# Altium PCB ZHL_RF_AMP.pcbdoc (part 1 of 2)
Units mm, origin at the board's own origin, x right, y up, seen from the top; angles counter-clockwise.
Board outline 160 x 100 mm, 2 copper layers (Top Layer, Bottom Layer), stack 1.51 mm thick; 97 components, 32 nets, 298 pads, 97 vias.
Unrouted connection lines stored in the file: 7.
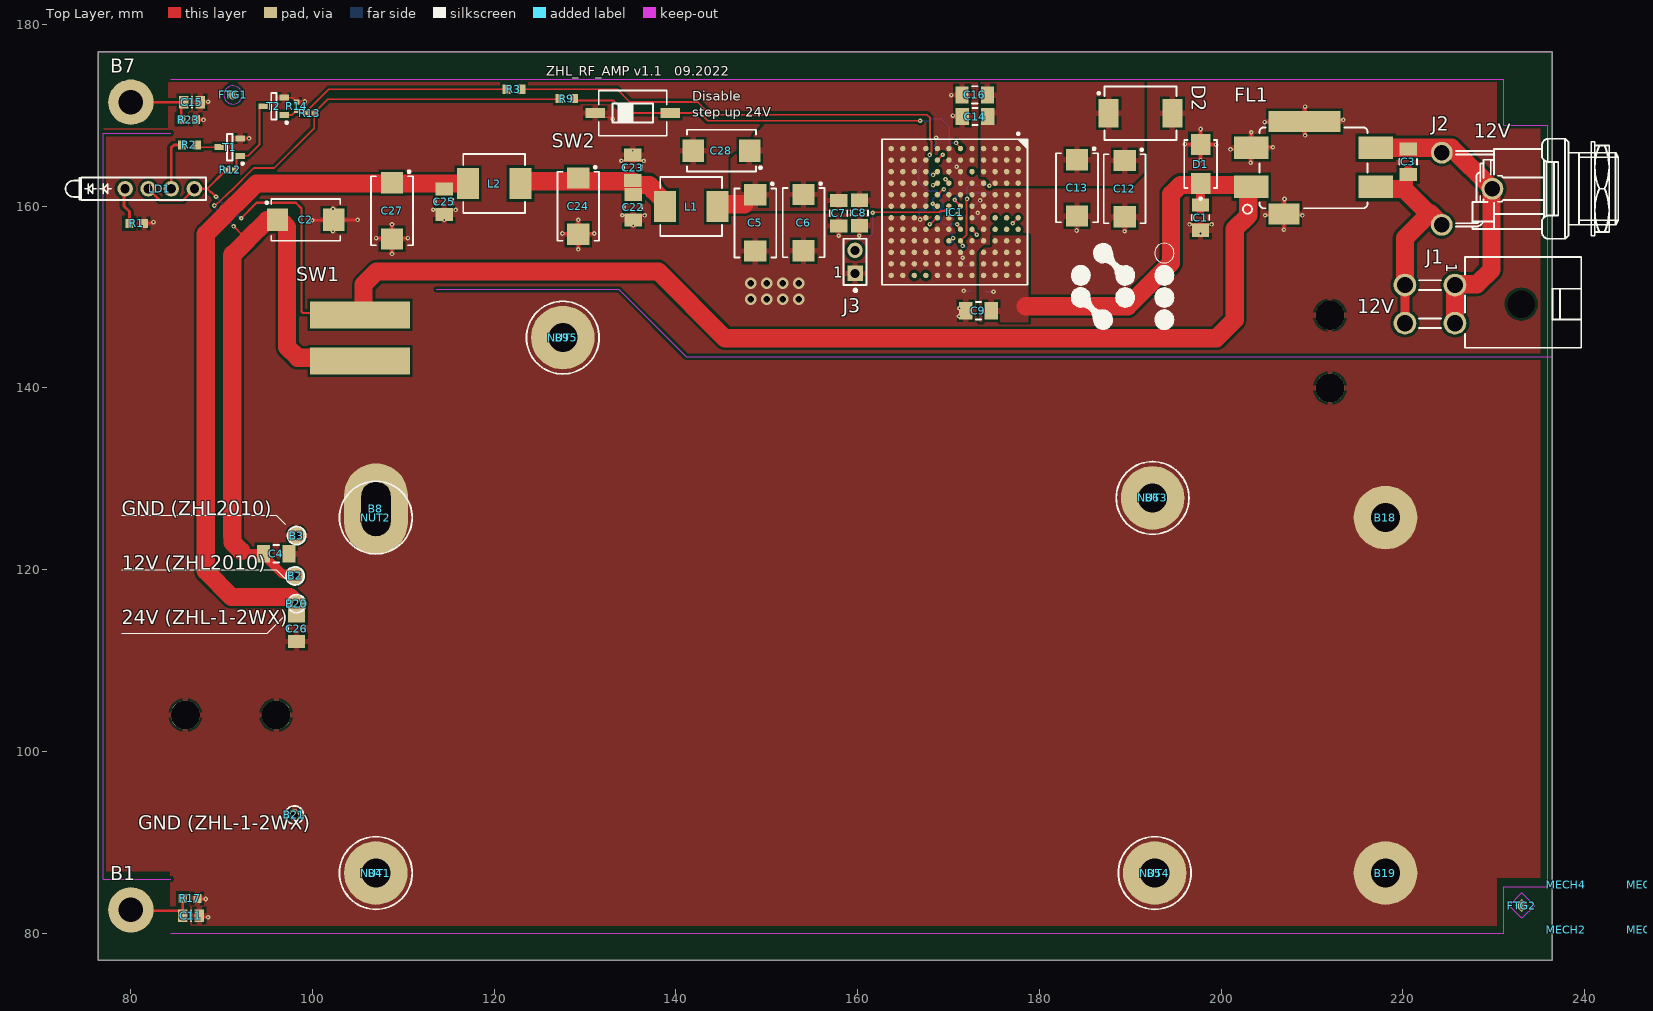
[diagram p0: Top Layer view]
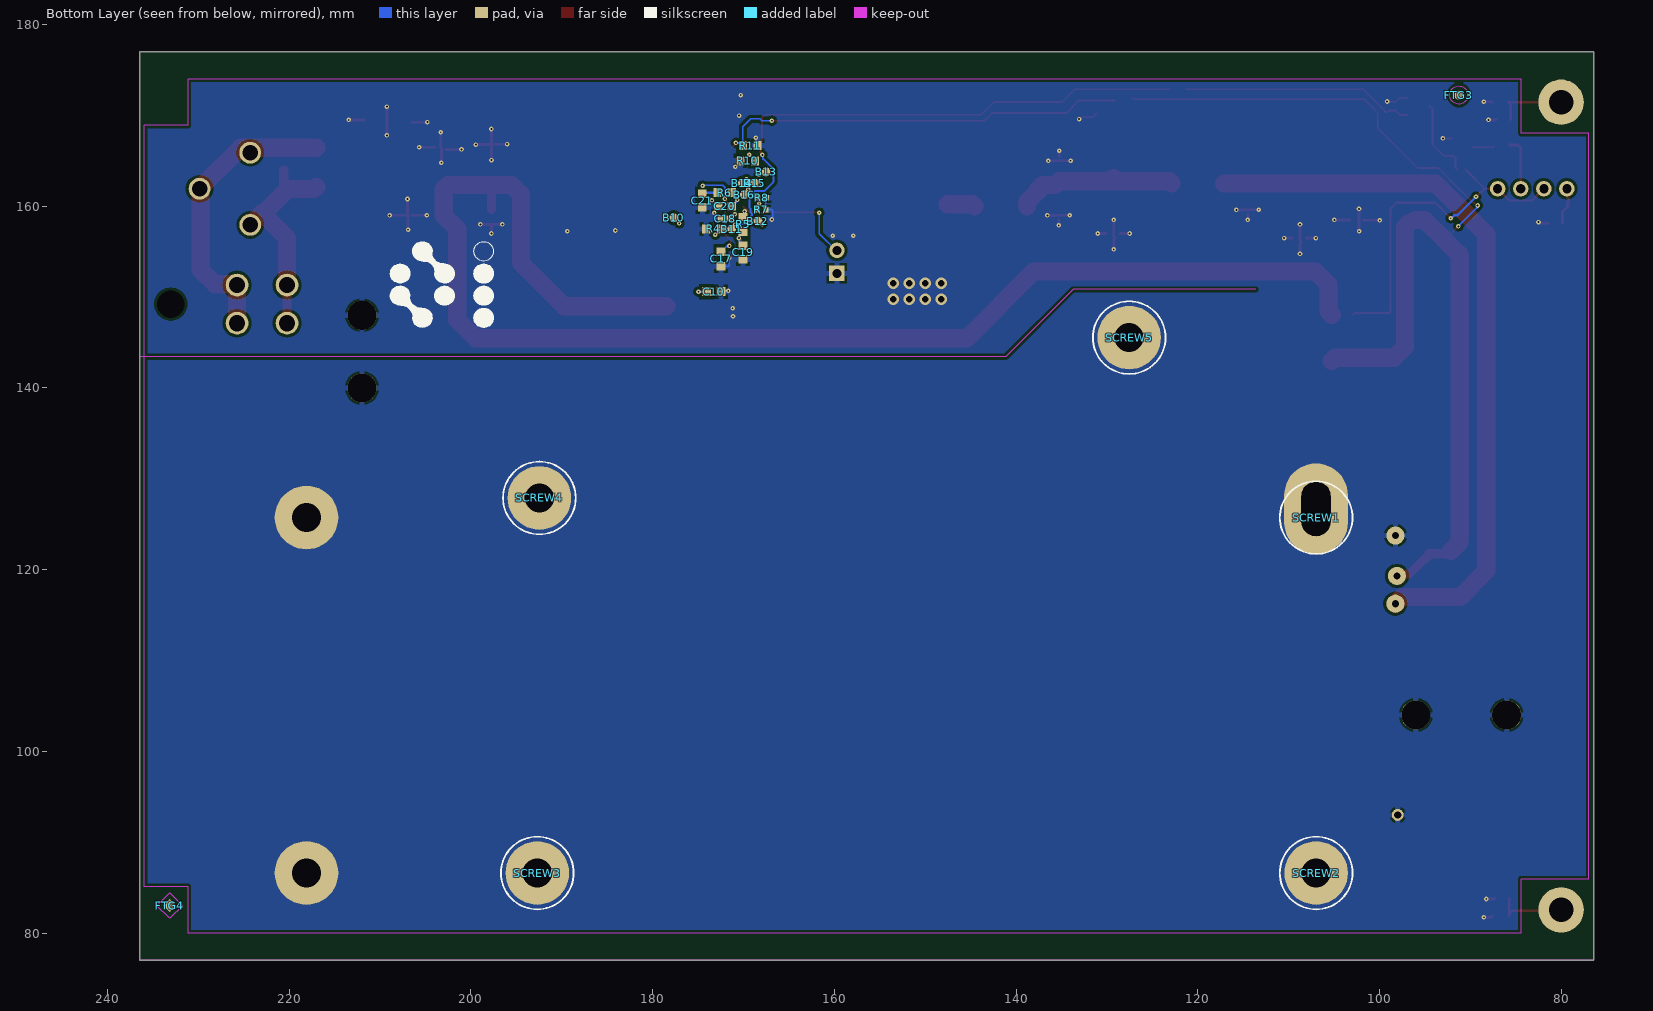
[diagram p1: Bottom Layer view, seen from below]
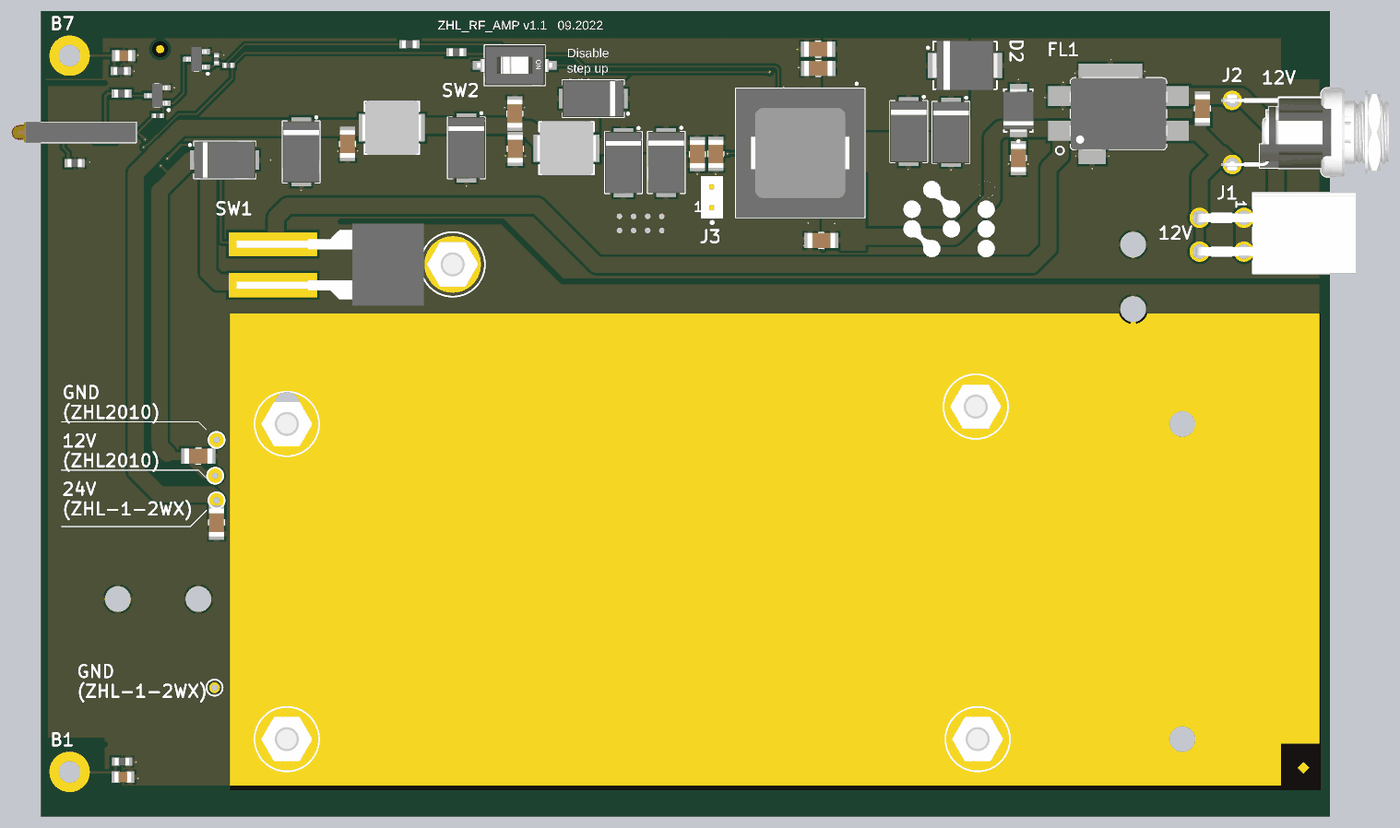
[diagram p2: 3D render of the assembled board from above, using the file's embedded part models]
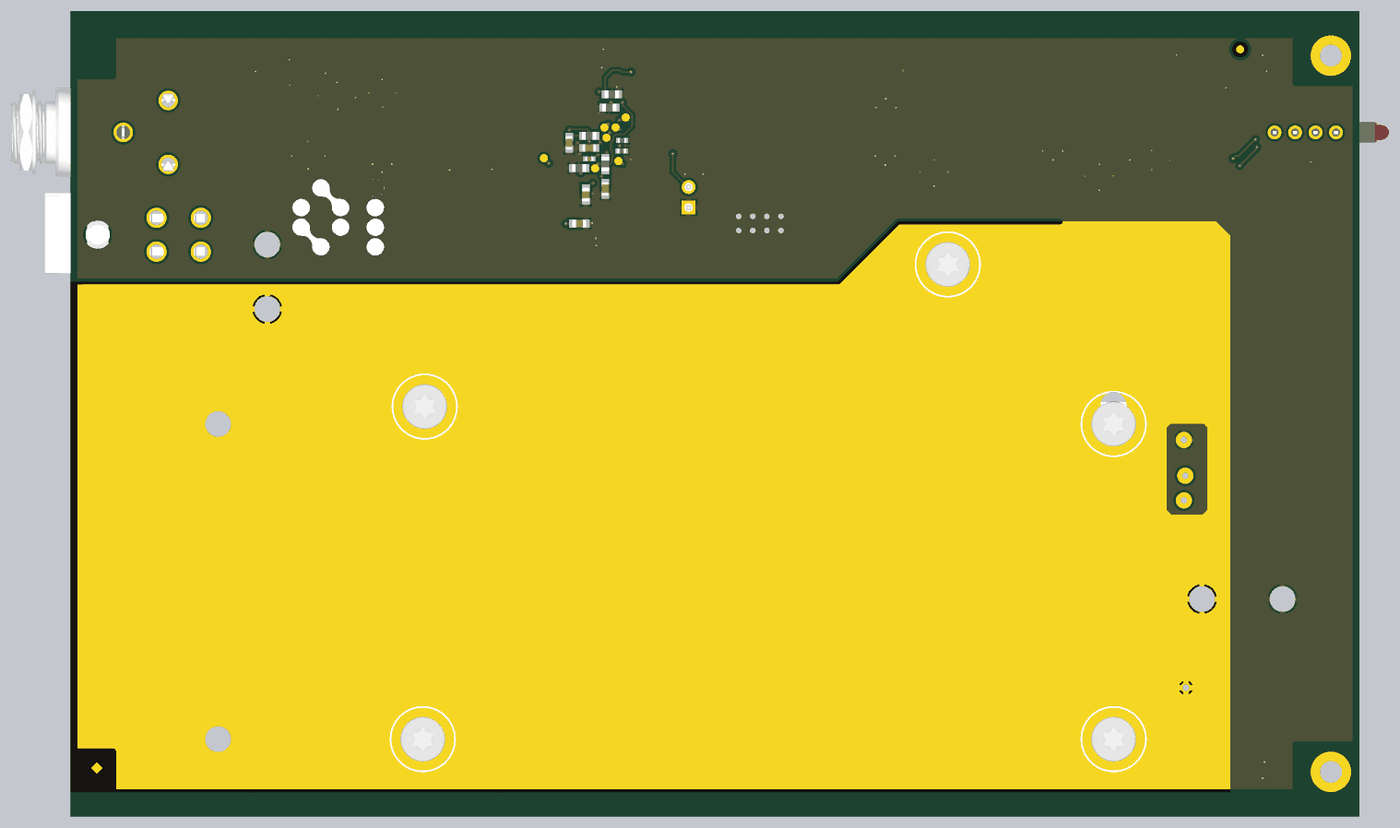
[diagram p3: 3D render of the assembled board from below, using the file's embedded part models]

## Layer stack, top to bottom
Top Solder: solder mask 0.02, Solder Resist, Dk 3.5
Top Layer: signal copper 0.105
Dielectric1: core 1.3, FR-4, Dk 4.8
Bottom Layer: signal copper 0.105
Bottom Solder: solder mask 0.02, Solder Resist, Dk 3.5

## Board outline
76.44,77 236.44,77 236.44,177 76.44,177

## Design rules (kind name [scope] priority, off if disabled: settings)
Clearance [All] p1: gap=0.31 ignorepadtopadclearanceinfootprint=FALSE except(0: Arc-Hole Track-Hole SMDPad-Hole THPad-Hole Via-Hole Fill-Hole Poly-Hole Region-Hole Text-Hole; 0.152: SMDPad-Via; 0.203: Arc-SMDPad Track-SMDPad SMDPad-SMDPad)
ComponentClearance [All] p1: gap=0 collisioncheckmode=3 verticalgap=0.35 showdistances=FALSE
FabricationTestPointUsage TestPointUsage [All] p1: valid=0 allowmultiple=FALSE
FabricationTestpoint Testpoint [All] p1: side=3 testpointundercomponent=TRUE minsize=1.016 maxsize=2.54 preferedsize=1.524 minholesize=0 maxholesize=1.016 preferedholesize=0.813 testpointgrid=0.025 allowsidetop=TRUE allowsidebottom=TRUE usegrid=TRUE gridtolerance=0
HoleSize [All] p1: absolutevalues=TRUE maxlimit=5 minlimit=0.2 maxpercent=80.000 minpercent=20.000
HoleToHoleClearance [All] p1: gap=0.2 allowstackedmicrovias=TRUE
MinimumSolderMaskSliver [All] p1: minsoldermaskwidth=0
PermittedLayers [All] p1: toplayerpermitted=TRUE bottomlayerpermitted=FALSE
PlaneConnect [All] p1: planeconnectstyle=Relief reliefexpansion=0.508 reliefentries=4 reliefconductorwidth=0.381 reliefairgap=0.381
PolygonConnect "Vias Direct Connect" [IsVia] p1: connectstyle=Direct reliefconductorwidth=0.254 reliefentries=4 polygonreliefangle="90 Angle" airgapwidth=0.254
PolygonConnect [All] p2: connectstyle=Relief reliefconductorwidth=0.635 reliefentries=4 polygonreliefangle="90 Angle" airgapwidth=0.254
RoomDefinition ZHL_RF_AMP [InComponentClass('ZHL_RF_AMP')] p1 off: confinementstyle=ConfineIn formatcopy=TRUE lockcomponents=FALSE outline 237.49,78.74 217.805,78.74 217.805,92.71 237.49,92.71
RoutingVias [All] p1: holewidth=0.5 width=1 viastyle="Through Hole" minholewidth=0.5 minwidth=1 maxholewidth=0.5 maxwidth=1 useviatemplates=TRUE viatemplateguid#1={BCE3457C-C7C0-4E2B-980E-B4B64992E005} viatemplateguid#2={BB2B6972-5096-462C-BB5A-72A028E2D88E} viatemplateguid#3={66140A83-6F2B-40DF-B3B9-31CC220CE52E} viatemplatename#1=v50h20m0mx0 viatemplatename#2=v60h30 viatemplatename#3=v127h71m0mx0
SilkToSilkClearance [All] p1: silktosilkclearance=0
SilkToSolderMaskClearance SilkscreenOverComponentPads [IsPad] p1: minsilkscreentomaskgap=0 clearancetoexposedcopper=TRUE
SolderMaskExpansion [All] p1: expansion=0 istentingtop=FALSE
Width [All] p1: maxlimit=2.54 minlimit=0.2 preferedwidth=0.305
21 further rules are at their usual default settings.

## Components (designator, comment, footprint, x,y, rotation, side; value= is the part's Value field where it differs from the comment)
B1 "Plated Hole" MTG270_500 80.01,82.55 r0 top
B2 "Plated Hole" c130h80#1 98.078,119.31 r0 top
B3 "Plated Hole" c130h80#1 98.25,123.75 r0 top
B4 "Plated Hole" MTG320_700#1 106.969,86.61 r0 top
B5 "Plated Hole" MTG320_700#1 192.699,86.61 r0 top
B6 "Plated Hole" MTG320_700#1 192.465,127.89 r0 top
B7 "Plated Hole" MTG270_500 80.01,171.45 r0 top
B8 "Plated Hole" MTG320_700#2 106.985,126.695 r0 top
B9 "Plated Hole" MTG320_700#1 127.55,145.54 r0 top
B10 "SMD Pad" C100 177.67,158.73 r90 bottom
B11 "SMD Pad" C100 171.32,157.46 r90 bottom
B12 "SMD Pad" C100 168.427,158.369 r90 bottom
B13 "SMD Pad" C100 167.513,163.779 r90 bottom
B14 "SMD Pad" C100 170.155,162.535 r90 bottom
B15 "SMD Pad" C100 168.78,162.54 r90 bottom
B16 "SMD Pad" C100 169.901,161.265 r90 bottom
B18 "Plated Hole" MTG320_700#1 218.099,125.73 r0 top
B19 "Plated Hole" MTG320_700#1 218.099,86.61 r0 top
B20 "Plated Hole" c130h80#1 98.25,116.25 r0 top
B21 "Plated Hole" c130h80#2 98,93 r0 top
C1 "10uF" CAPC3216X190N 197.75,158.75 r90 top
C2 "47uF" CAPMP7343X430N 99.25,158.5 r0 top
C3 "10uF" CAPC3216X190N 220.605,164.885 r270 top
C4 "10uF" CAPC3216X190N 96,121.75 r180 top
C5 "47uF" CAPMP7343X430N 148.742,158.166 r270 top
C6 "47uF" CAPMP7343X430N 154.051,158.191 r270 top
C7 "10uF" CAPC3216X190N 157.912,159.233 r90 top
C8 "10uF" CAPC3216X190N 160.198,159.258 r90 top
C9 "10uF" CAPC3216X190N 173.3,148.5 r0 top
C10 "1uF" CAPC1608X87N 173.279,150.597 r0 bottom
C11 "Undefined" CAPC2012X135N 86.625,81.915 r0 top
C12 "47uF" CAPMP7343X430N 189.398,161.929 r270 top
C13 "47uF" CAPMP7343X430N 184.148,162.029 r270 top
C14 "10uF" CAPC3216X190N 172.923,169.875 r0 top
C15 "Undefined" CAPC2012X135N 86.73,171.45 r0 top
C16 "10uF" CAPC3216X190N 172.9,172.25 r0 top
C17 "1uF" CAPC1608X87N 172.466,154.203 r90 bottom
C18 "100nF" CAPC1005X55N 172.034,158.648 r180 bottom
C19 "4.7uF" CAPC1608X90N 170.05,154.92 r270 bottom
C20 "Undefined" CAPC1608X90N 172.05,160 r180 bottom
C21 "Undefined" CAPC1608X90N 174.523,160.63 r90 bottom
C22 "10uF" CAPC3216X190N 135.306,159.893 r90 top
C23 "10uF" CAPC3216X190N 135.25,164.25 r270 top
C24 "47uF" CAPMP7343X430N 129.25,160 r270 top
C25 "10uF" CAPC3216X190N 114.5,160.5 r90 top
C26 "10uF" CAPC3216X190N 98.25,113.5 r90 top
C27 "47uF" CAPMP7343X430N 108.75,159.5 r270 top
C28 "47uF" CAPMP7343X430N 145.009,166.116 r180 top
D1 "SMBJ12A" DIOM5336X265N 197.745,164.64 r90 top
D2 "B560C-13-F" DIOM7959X250N 191.135,170.231 r0 top
FL1 "10A/50VDC" FIL_MURATA_BNX02 210.175,164.23 r180 top
FTG1 "Use only in PCB" FIDUCIAL_TOP_C100-200 91.25,172.25 r90 top
FTG2 "Use only in PCB" FIDUCIAL_TOP_S100-200 233.121,83.033 r90 top
FTG3 "Use only in PCB" FIDUCIAL_TOP_C100-200 91.262,172.237 r90 bottom
FTG4 "Use only in PCB" FIDUCIAL_TOP_S100-200 233.147,83.033 r90 bottom
IC1 "LTM4656EY" BGA144C127P12X12_1600X1600X742 170.685,159.365 r270 top
J1 "Mini-Fit Jr.™" MOLEX_39-30-0040 222.995,149.225 r270 top
J2 "Jack" SWITCHCRAFT_712RA 229.87,161.925 r90 top
J3 "Header 2" SAMTEC_HTSW-101-23-L-D 159.715,153.873 r0 top
L1 "10uH" INDM6965X300N 141.681,159.969 r180 top
L2 "10uH" INDM6965X300N 120,162.5 r180 top
LD1 "Red/Green" LED_DIALIGHT_571-0112F 79.375,161.925 r0 top
MECH1 "PE9067" GENERIC_MECH 246.863,80.366 r90 top
MECH2 "PE9067" GENERIC_MECH 237.973,80.366 r90 top
MECH3 "ZHL-1-2WX-S" GENERIC_MECH 246.863,85.293 r90 top
MECH4 "20849107" GENERIC_MECH 237.973,85.293 r90 top
MECH5 "ZHL-2010s" GENERIC_MECH 255.778,85.293 r90 top
NUT1 "M3" BOSSARD_BN628-1241443_v 106.969,86.61 r0 top
NUT2 "M3" BOSSARD_BN628-1241443_v 106.969,125.73 r0 top
NUT3 "M3" BOSSARD_BN628-1241443_v 192.465,127.89 r0 top
NUT4 "M3" BOSSARD_BN628-1241443_v 192.699,86.61 r0 top
NUT5 "M3" BOSSARD_BN628-1241443_v 127.55,145.54 r0 top
R1 "4k7" RESC1608X55N 80.645,158.115 r180 top
R2 "4k7" RESC1608X55N 86.45,166.75 r180 top
R3 "0" RESC1608X55N 122.174,172.872 r180 top
R4 "11k5" RESC1608X55N 173.3,157.5 r0 bottom
R5 "0" RESC1608X55N 170.05,158 r90 bottom
R6 "Undefined" RESC1608X55N 172.05,161.5 r0 bottom
R7 "120k" RESC1005X40N 168.021,159.614 r0 bottom
R8 "120k" RESC1005X40N 167.97,160.934 r0 bottom
R9 "4k7" RESC1608X55N 127.991,171.856 r0 top
R10 "20k" RESC1608X55N 169.55,165 r180 bottom
R11 "4k7" RESC1608X55N 169.246,166.668 r0 bottom
R12 "120k" RESC1005X40N 90.97,164 r180 top
R13 "120k" RESC1005X40N 99.72,170.25 r0 top
R14 "120k" RESC1005X40N 98.25,171 r270 top
R17 "0" RESC1608X55N 86.525,83.82 r180 top
R23 "0" RESC1608X55N 86.36,169.545 r180 top
SCREW1 "M3x8" BOSSARD_BN5687-3061606_v 106.969,125.73 r180 bottom
SCREW2 "M3x8" BOSSARD_BN5687-3061606_v 106.969,86.61 r180 bottom
SCREW3 "M3x8" BOSSARD_BN5687-3061606_v 192.699,86.61 r180 bottom
SCREW4 "M3x8" BOSSARD_BN5687-3061606_v 192.465,127.89 r180 bottom
SCREW5 "M3x8" BOSSARD_BN5687-3061606_v 127.55,145.54 r180 bottom
SW1 "67L090" AIRPAX_6700_h_a 105.25,145.5 r270 top
SW2 "Switch" SW_OMRON_A6SN-1101 135.25,170.25 r0 top
T1 "BSS138LT1G" SOT95P240X110-3N 90.9,166.5 r180 top
T2 "BSS138LT1G" SOT95P240X110-3N 95.75,171 r180 top

## Footprints (in the part's own frame and the unit in brackets; to place one, negate y for a bottom-side part, rotate by r counter-clockwise, add the part's x,y. Pads: shape width x height; smd on the part's side, far side on the other; paste and mask are expansions set on the pad)
AIRPAX_6700_h_a [mm] "TO-220 2-Terminal - Horizontal Surface Mount Through The Circuit Board"
  rect 3x11 smd paste-1.5: 1(-2.54,0) 2(2.54,0)
  body extent -5.08,-4.5 5.08,25.09, height 3.95
BGA144C127P12X12_1600X1600X742 [mm] "BGA, 1.27mm Pitch, Square; 144 Pin, 12 Columns X 12 Rows,16.00mm X 16.00mm X 7.42mm H (w/Reversed Pins)"
  round 0.6 smd: A1(-6.985,6.985) A2(-5.715,6.985) A3(-4.445,6.985) A4(-3.175,6.985) A5(-1.905,6.985) A6(-0.635,6.985) A7(0.635,6.985) A8(1.905,6.985) A9(3.175,6.985) A10(4.445,6.985) A11(5.715,6.985) A12(6.985,6.985) B1(-6.985,5.715) B2(-5.715,5.715) B3(-4.445,5.715) B4(-3.175,5.715) B5(-1.905,5.715) B6(-0.635,5.715) B7(0.635,5.715) B8(1.905,5.715) B9(3.175,5.715) B10(4.445,5.715) B11(5.715,5.715) B12(6.985,5.715) C1(-6.985,4.445) C2(-5.715,4.445) C3(-4.445,4.445) C4(-3.175,4.445) C5(-1.905,4.445) C6(-0.635,4.445) C7(0.635,4.445) C8(1.905,4.445) C9(3.175,4.445) C10(4.445,4.445) C11(5.715,4.445) C12(6.985,4.445) D1(-6.985,3.175) D2(-5.715,3.175) D3(-4.445,3.175) D4(-3.175,3.175) D5(-1.905,3.175) D6(-0.635,3.175) D7(0.635,3.175) D8(1.905,3.175) D9(3.175,3.175) D10(4.445,3.175) D11(5.715,3.175) D12(6.985,3.175) E1(-6.985,1.905) E2(-5.715,1.905) E3(-4.445,1.905) E4(-3.175,1.905) E5(-1.905,1.905) E6(-0.635,1.905) E7(0.635,1.905) E8(1.905,1.905) E9(3.175,1.905) E10(4.445,1.905) E11(5.715,1.905) E12(6.985,1.905) F1(-6.985,0.635) F2(-5.715,0.635) F3(-4.445,0.635) F4(-3.175,0.635) F5(-1.905,0.635) F6(-0.635,0.635) F7(0.635,0.635) F8(1.905,0.635) F9(3.175,0.635) F10(4.445,0.635) F11(5.715,0.635) F12(6.985,0.635) G1(-6.985,-0.635) G2(-5.715,-0.635) G3(-4.445,-0.635) G4(-3.175,-0.635) G5(-1.905,-0.635) G6(-0.635,-0.635) G7(0.635,-0.635) G8(1.905,-0.635) G9(3.175,-0.635) G10(4.445,-0.635) G11(5.715,-0.635) G12(6.985,-0.635) H1(-6.985,-1.905) H2(-5.715,-1.905) H3(-4.445,-1.905) H4(-3.175,-1.905) H5(-1.905,-1.905) H6(-0.635,-1.905) H7(0.635,-1.905) H8(1.905,-1.905) H9(3.175,-1.905) H10(4.445,-1.905) H11(5.715,-1.905) H12(6.985,-1.905) J1(-6.985,-3.175) J2(-5.715,-3.175) J3(-4.445,-3.175) J4(-3.175,-3.175) J5(-1.905,-3.175) J6(-0.635,-3.175) J7(0.635,-3.175) J8(1.905,-3.175) J9(3.175,-3.175) J10(4.445,-3.175) J11(5.715,-3.175) J12(6.985,-3.175) K1(-6.985,-4.445) K2(-5.715,-4.445) K3(-4.445,-4.445) K4(-3.175,-4.445) K5(-1.905,-4.445) K6(-0.635,-4.445) K7(0.635,-4.445) K8(1.905,-4.445) K9(3.175,-4.445) K10(4.445,-4.445) K11(5.715,-4.445) K12(6.985,-4.445) L1(-6.985,-5.715) L2(-5.715,-5.715) L3(-4.445,-5.715) L4(-3.175,-5.715) L5(-1.905,-5.715) L6(-0.635,-5.715) L7(0.635,-5.715) L8(1.905,-5.715) L9(3.175,-5.715) L10(4.445,-5.715) L11(5.715,-5.715) L12(6.985,-5.715) M1(-6.985,-6.985) M2(-5.715,-6.985) M3(-4.445,-6.985) M4(-3.175,-6.985) M5(-1.905,-6.985) M6(-0.635,-6.985) M7(0.635,-6.985) M8(1.905,-6.985) M9(3.175,-6.985) M10(4.445,-6.985) M11(5.715,-6.985) M12(6.985,-6.985)
  silkscreen extent -8.72,-8 8,8, body extent -8,-8 8,8, height 7.42
BOSSARD_BN628-1241443_v [mm] "M3 Hexagon Nut ~0,8d, ISO 4032, DIN 934, Stainless Steel A2"
  silkscreen extent -4,-4 4,4, body extent -3.18,-2.75 3.18,2.75, height 4.94
BOSSARD_BN5687-3061606_v [mm] "M3 L=8mm Hexalobular Socket Pan Head Screw, Fully Threaded - Stainless Steel A2"
  silkscreen extent -4,-4 4,4, body extent -2.8,-2.8 2.8,2.8, height 2.4
C100 [mm] "1mm Diameter SMD Pad"
  round 1 smd paste-1: 1(0,0)
c130h80#1 [mm] "Plated Through Hole: Hole Dia.=0.8mm Pad Dia.=1.30mm, , IPC-7251 Level C"
  round 2 hole 0.8: 1(0,0)
  silkscreen extent -1,-1 1,1
c130h80#2 [mm] "Plated Through Hole: Hole Dia.=0.8mm Pad Dia.=1.30mm, , IPC-7251 Level C"
  round 1.3 hole 0.8: 1(0,0)
  silkscreen extent -1,-1 1,1
CAPC1005X55N [mm] "Capacitor, Non-Polarized, Chip; 1.00mm L X 0.50mm W X 0.70mm H, IPC Medium Density"
  rect 0.62x0.62 smd: 1(-0.45,0) 2(0.45,0)
  body extent -0.52,-0.27 0.53,0.28, height 0.55
CAPC1608X87N [mm] "Chip Capacitor, Body 1.6x0.8mm IPC Medium Density"
  rect 0.95x1 smd: 1(-0.8,0) 2(0.8,0)
  body extent -0.87,-0.47 0.88,0.48, height 0.87
CAPC1608X90N [mm] "Chip Capacitor, Body 1.6x0.8mm IPC Medium Density"
  rect 0.95x0.95 smd: 1(-0.75,0) 2(0.75,0)
  body extent -0.85,-0.45 0.85,0.45, height 0.9
CAPC2012X135N [mm] "Chip Capacitor, Body 2.0x1.25mm, IPC Medium Density"
  rect 1.05x1.4 smd: 1(-0.9,0) 2(0.9,0)
  silkscreen extent 0,-0.58 0,0.58, body extent -1.05,-0.67 1.05,0.68, height 1.25
CAPC3216X190N [mm] "Chip Capacitor, Body 3.2x1.6mm, IPC Medium Density"
  rect 1.45x1.9 smd: 1(-1.4,0) 2(1.4,0)
  silkscreen extent -0.3,-0.95 0.3,0.95, body extent -1.75,-0.95 1.75,0.95, height 1.9
CAPMP7343X430N [mm] "Capacitor, Polarized, Molded  Body 7.3x4.3mm, IPC Medium Density"
  rect 2.35x2.45 smd: 1(-3.1,0) 2(3.1,0)
  silkscreen extent -4.42,-2.3 3.8,2.3, body extent -3.8,-2.3 3.8,2.3, height 4.3
DIOM5336X265N [mm] "DO-214-AA/SMB Diode, Molded Body; 5.34mm L X 3.625mm W X 2.65mm H, IPC Medium Density"
  rect 2.3x2.15 smd: 1(-2.15,0) 2(2.15,0)
  silkscreen extent -3.92,-1.8 2.65,1.8, body extent -2.7,-1.95 2.7,1.95, height 2.4
DIOM7959X250N [mm] "DO-214-AB/SMC Molded Diode, Body 7.9x5.9mm, IPC Medium Density"
  rect 2.2x3.1 smd: 1(-3.5,0) 2(3.5,0)
  silkscreen extent -4.72,-2.95 3.95,2.95, body extent -4.06,-3.11 4.07,3.11, height 2.5
FIDUCIAL_TOP_C100-200 [mm] "Round Fiducial Target, Top Layer, 1.0mm, Top Solder 2.0mm, Keepout =2.0mm"
  round 1 smd paste-0.51 mask+0.5: FTG2(0,0)
  Top Layer keep-out circle w0.1: c0,0 r1
FIDUCIAL_TOP_S100-200 [mm] "Square Fiducial Target, Top Layer, 1.0mm, Top Solder 2.0mm, Keepout =2.0mm"
  rect 1x1 smd rot 45 paste-0.51 mask+0.5: 1(0,0)
  Top Layer keep-out region: 1.414,0 0,-1.414 -1.414,0 0,1.414
FIL_MURATA_BNX02 [mm] "Block Type EMIFIL LC Combined Type, BNX02* Series"
  rect 3.8x2.5 smd: 1(-6.85,2.1) 2(6.85,2.1) 3(-6.85,-2.2) 4(6.85,-2.2)
  rect 7.9x2.3 smd: 4(1,-5.1)
  rect 3.4x2.3 smd: 4(3.25,5.1)
  silkscreen extent -5.95,-4.45 7.77,5.05, body extent -6.05,-4.55 6.05,4.55, height 3.1
GENERIC_MECH [mm]
INDM6965X300N [mm] "Inductor Molded Body, Body 6.86mm L X 6.47mm W X 3mm H, IPC Medium Density"
  rect 2.4x3.4 smd: 1(-2.9,0) 2(2.9,0)
  silkscreen extent -3.4,-3.25 3.4,3.25, body extent -3.62,-3.36 3.62,3.36, height 3
LED_DIALIGHT_571-0112F [mm] "2x 2mm LED (Top: Red, Bot: Green) PCB Edge Mounting (Without positioning pins) DIALIGHT 571 Serie"
  round 1.7 hole 1: 1(0,0) 2(2.54,0) 3(5.08,0) 4(7.62,0)
  silkscreen extent -6.55,-1.24 8.89,1.24, body extent -6.55,-1.24 8.89,1.24, height 8.61
MOLEX_39-30-0040 [mm] "4.20mm (.165\") Pitch Mini-Fit Jr. Header, Dual Row, Right Angle with Snap-in Plastic Peg PCB Lock, 4 Circuits"
  round 2.5 hole 1.8: 1(-2.1,2.75) 2(2.1,2.75) 3(-2.1,-2.75) 4(2.1,-2.75)
  round 1 hole 3 unplated mask+1: 5(0,10.05)
  silkscreen extent -5.2,-1.24 4.8,16.65, body extent -5.2,-3.28 4.8,16.65, height 11.4
MTG270_500 [mm] "Plated Through Hole: Hole Dia.=2.7mm Pad Dia.=5.0mm"
  round 5 hole 2.7: 1(0,0)
MTG320_700#1 [mm] "Plated Through Hole: Hole Dia.=3.2mm Pad Dia.=7.0mm"
  round 7 hole 3.2: 1(0,0)
MTG320_700#2 [mm] "Plated Through Hole: Hole Dia.=3.2mm Pad Dia.=7.0mm"
  oval 7x10 hole 3.2 slot 6 at 90 deg: 1(0,0)
RESC1005X40N [mm] "Chip Resistor, EIA 0402, Metric 1005, Body 1.0x0.5mm, IPC Medium Density"
  rect 0.58x0.62 smd: 1(-0.47,0) 2(0.47,0)
  body extent -0.52,-0.27 0.53,0.28, height 0.4
RESC1608X55N [mm] "Chip Resistor, EIA 0603, Metric 1608, Body 1.6x0.8mm, IPC Medium Density"
  rect 0.9x1 smd: 1(-0.8,0) 2(0.8,0)
  body extent -0.87,-0.47 0.88,0.48, height 0.55
SAMTEC_HTSW-101-23-L-D [mm] "2 Contacts - Pitch 2.54mm - Dual Row  Through Mount Straigh Header (Post Lead 5.84mm, Tail Lead 2.92mm, Insulator 2.54mm)"
  rect 1.7x1.7 hole 1: 1(0,-1.27)
  round 1.7 hole 1: 2(0,1.27)
  silkscreen extent -1.27,-3.28 1.27,2.54, body extent -1.27,-2.54 1.27,2.54, height 8.38
SOT95P240X110-3N [mm] "SOT23 3-Leads, Pitch 0.95mm, Body 1.3x2.9mm, IPC Medium Density"
  rect 1.05x0.65 smd: 1(-1.15,0.95) 2(-1.15,-0.95) 3(1.15,0)
  silkscreen extent -1.53,-1.45 0.3,1.92, body extent -1.25,-1.5 1.25,1.5, height 1.1
SW_OMRON_A6SN-1101 [mm] "Body 4.48x7.5mm, 1 Way SPST Surface-Mounting Slide Switch With Flat Actuator (A6SN Series)"
  rect 2.15x1.1 smd: 1(-4.125,0) 2(4.125,0)
  silkscreen extent -3.75,-2.49 3.75,2.49, body extent -4.65,-2.49 4.65,2.49, height 4.6
SWITCHCRAFT_712RA [mm] "2.5 mm Center Pin, 5A, 48VDC, Right Angle, Through Hole, Locking Power Jack Connector (Threaded Bushings)"
  round 2.4 hole 1.7: 1(-3.972,5.578) 2(0,0) 3(3.965,5.573)
  silkscreen extent -5.51,-13.85 5.51,4.04, body extent -5.51,-13.85 5.51,6.96, height 13.89

## Part data
B1 B7: library part PLATED_HOLE2.7_PAD5.0, "Single Terminal Socket", Author="CERN DEM JMW", Component Type="Standard (No BOM)", ComponentHeight=0mm, CreateDate=27.09.2011, Family="Plated Hole", HelpURL=Undefined, LatestRevisionDate=27.09.2011, Mounted=No, PackageDescription="Plated Through Hole: Hole Dia.=2.7mm Pad Dia.=5.0mm", Part Description="Plated Through Hole: Hole Dia.=2.7mm Pad Dia.=5.0mm", Part Number=PLATED_HOLE2.7_PAD5.0, Pin Count=1, Sense=No, SMD=No, Socket=No, Status=None
B2 B3 B20 B21: library part PLATED_HOLE0.8_PAD1.3, "Single Terminal Socket", Author="CERN DEM JLC", Component Type="Standard (No BOM)", ComponentHeight=0mm, CreateDate=30.10.2008, Family="Plated Hole", HelpURL=Undefined, LatestRevisionDate=30.10.2008, Mounted=No, PackageDescription="Plated Through Hole: Hole Dia.=0.8mm Pad Dia.=1.3mm, IPC-7251 Level C", Part Description="Plated Through Hole: Hole Dia.=0.8mm Pad Dia.=1.3mm, IPC-7251 Level C", Part Number=PLATED_HOLE0.8_PAD1.3, Pin Count=1, Sense=No, SMD=No, Socket=No, Status=None
B4 B5 B6 B8 B9 B18 B19: library part PLATED_HOLE3.2_PAD7.0, "Single Terminal Socket", Author="CERN DEM JMW", Component Type="Standard (No BOM)", ComponentHeight=0mm, CreateDate=28.11.2017, Family="Plated Hole", HelpURL=Undefined, LatestRevisionDate=28.11.2017, Mounted=No, PackageDescription="Plated Through Hole: Hole Dia.=3.2mm Pad Dia.=7.0mm", Part Description="Plated Through Hole: Hole Dia.=3.2mm Pad Dia.=7.0mm", Part Number=PLATED_HOLE3.2_PAD7.0, Pin Count=1, Sense=No, SMD=No, Socket=No, Status=None
B10 B11 B12 B13 B14 B15 B16: library part SMD_PAD_D1MM, "Through Hole Pad", Author="CERN DEM JLC", Component Type="Standard (No BOM)", ComponentHeight=0mm, CreateDate=10.10.2017, Family="SMD Pad", HelpURL=Undefined, LatestRevisionDate=10.10.2017, Mounted=No, PackageDescription="1mm Diameter SMD Pad", Part Description="1mm Diameter SMD Pad", Part Number=SMD_PAD_D1MM, Pin Count=1, Sense=No, SMD=No, Socket=No, Status=None
C1 C3 C4 C7 C8 C9 C14 C16 C22 C23 C25 C26: library part CC1206_10UF_35V_10%_X7R_YUDEN_GMJ316BB7106KLHT, "Non-polarised capacitor", Case=1206, Manufacturer="TAIYO YUDEN", Manufacturer Part Number=GMJ316BB7106KLHT, Tolerance=±10%, Voltage=35V, Author="CERN DEM BC", Component Type=Standard, ComponentHeight=1.90mm, CreateDate=26.02.2016, HelpURL=\\cern.ch\dfs\Applications\Altium\Datasheets\CC1206_TAIYO-YUDEN_GMJ316BB7106KLHT.pdf, LatestRevisionDate=17.12.2018, Mounted=Yes, Part Description="Soft Termination SMD Multilayer Chip Ceramic Capacitor for Automotive / Industrial Applications", Part Number=CC1206_10UF_35V_10%_X7R_YUDEN_GMJ316BB7106KLHT, Pin Count=2, Sense=No, SMD=Yes, Socket=No, Status="Not Recommended", TC=X7R
C2 C5 C6 C12 C13 C24 C27 C28: library part CTE7343-43_47UF_35V_10%_LESR0300, "Polarised capacitor", Case=E, Manufacturer=GENERIC, Manufacturer1 ComponentHeight=4.3mm, Manufacturer1 Example=KEMET, Manufacturer1 Part Number=T495X476K035ATE300, Tolerance=±10%, Voltage=35V, Author="CERN DEM JLC", Component Type=Standard, CreateDate=27.05.2013, HelpURL=\\cern.ch\dfs\Applications\Altium\Datasheets\CTE_KEMET_T495.pdf, LatestRevisionDate=29.10.2018, Manufacturer Part Number=CTE7343-43_47UF_35V_10%_LESR0300, Mounted=Yes, Part Description="ESR 0R3 Solid Tantalum Chip Capacitor", Part Number=CTE7343-43_47UF_35V_10%_LESR0300, Pin Count=2, Sense=No, SMD=Yes, Socket=No, Status=Preferred
C10 C17: library part CC0603_1UF_25V_10%_X7R, "Non-polarised capacitor", Case=0603, Manufacturer=GENERIC, Manufacturer1 ComponentHeight=0.9mm, Manufacturer1 Example=MURATA, Manufacturer1 Part Number=GRM188R71E105KA12D, Tolerance=±10%, Voltage=25V, Author="CERN DEM JLC", Component Type=Standard, CreateDate=18.01.2011, HelpURL=\\cern.ch\dfs\Applications\Altium\Datasheets\CC0603_X7R_MURATA.pdf, LatestRevisionDate=18.01.2011, Manufacturer Part Number=CC0603_1UF_25V_10%_X7R, Mounted=Yes, Part Description="SMD Multilayer Chip Ceramic Capacitor", Part Number=CC0603_1UF_25V_10%_X7R, Pin Count=2, Sense=No, SMD=Yes, Socket=No, Status=None, TC=X7R
C11 C15: library part CC0805_NO-VALUE, "Non-polarised capacitor", Case=0805, Manufacturer1 ComponentHeight=1.35mm, Author="CERN DEM JLC", Component Type=Standard, CreateDate=10.12.2008, HelpURL=Undefined, LatestRevisionDate=11.09.2013, Manufacturer=Undefined, Manufacturer Part Number=CC0805_NO-VALUE, Mounted=No, Part Description="Reserved Footprint For 0805(2012) Chip Ceramic Capacitor", Part Number=CC0805_NO-VALUE, Pin Count=2, Sense=No, SMD=Yes, Socket=No, Status=None
C18: library part CC0402_100NF_50V_10%_X7R, "Non-polarised capacitor", Case=0402, Manufacturer=GENERIC, Manufacturer1 ComponentHeight=0.55mm, Manufacturer1 Example=MURATA, Manufacturer1 Part Number=GRM155R71H104KE14D, Tolerance=±10%, Voltage=50V, Author="CERN DEM MR", Component Type=Standard, CreateDate=30.06.2017, HelpURL=\\cern.ch\dfs\Applications\Altium\Datasheets\CC0402_MURATA_GRM155R71H104KE14D.pdf, LatestRevisionDate=30.06.2017, Manufacturer Part Number=CC0402_100NF_50V_10%_X7R, Mounted=Yes, Part Description="SMD Multilayer Chip Ceramic Capacitor", Part Number=CC0402_100NF_50V_10%_X7R, Pin Count=2, Sense=No, SMD=Yes, Socket=No, Status=None, TC=X7R
C19: library part CC0603_4.7UF_25V_10%_X5R, "Non-polarised capacitor", Case=0603, Manufacturer=GENERIC, Manufacturer1 ComponentHeight=0.95mm, Manufacturer1 Example=MURATA, Manufacturer1 Part Number=GRM188R61E475KE11D, Tolerance=±10%, Voltage=25V, Author="CERN DEM JLC", Component Type=Standard, CreateDate=10.11.2014, HelpURL=\\cern.ch\dfs\Applications\Altium\Datasheets\CC0603_MURATA_GRM188R61E475KE11D.pdf, LatestRevisionDate=10.11.2014, Manufacturer Part Number=CC0603_4.7UF_25V_10%_X5R, Mounted=Yes, Part Description="SMD Multilayer Chip Ceramic Capacitor", Part Number=CC0603_4.7UF_25V_10%_X5R, Pin Count=2, Sense=No, SMD=Yes, Socket=No, Status=None, TC=X5R
C20 C21: library part CC0603_NO-VALUE, "Non-polarised capacitor", Case=0603, Manufacturer1 ComponentHeight=0.9mm, Author="CERN DEM MR", Component Type=Standard, CreateDate=22.11.2016, HelpURL=Undefined, LatestRevisionDate=22.11.2016, Manufacturer=Undefined, Manufacturer Part Number=CC0603_NO-VALUE, Mounted=No, Part Description="Reserved Footprint For 0603(1608) Chip Ceramic Capacitor", Part Number=CC0603_NO-VALUE, Pin Count=2, Sense=No, SMD=Yes, Socket=No, Status=None
D1: "Zener Diode", Case=DO-214AA, Manufacturer="FAIRCHILD SEMICONDUCTOR", Power=600W, Voltage=12V, Author="CERN DEM JLC", Bonding=No, Component Type=Standard, ComponentHeight=2.65mm, CreateDate=10.04.2013, Device=SMBJ12A, HelpURL=\\cern.ch\dfs\Applications\Altium\Datasheets\SMBJ.pdf, LatestRevisionDate=10.04.2013, Manufacturer Part Number=SMBJ12A, Mounted=Yes, PackageDescription="DO-214-AA/SMB Diode, Molded Body; 5.34mm L X 3.625mm W X 2.65mm H, IPC Medium Density", Part Description="Uni-Directional Transient Voltage Suppressor Diode", Part Number=SMBJ12A, Pin Count=2, PressFit=No, Sense=No, SMD=Yes, Socket=No
D2: "Schottky Diode", Case=SMC, Manufacturer="DIODES INCORPORATED", Manufacturer Part Number=B560C, Power=5A, Voltage=60V, Author="CERN DEM MR", Bonding=No, Component Type=Standard, ComponentHeight=2.5mm, CreateDate=14.03.2016, Device=B560C-13-F, HelpURL=\\cern.ch\dfs\Applications\Altium\Datasheets\B560C-13-F.pdf, LatestRevisionDate=29.06.2022, Mounted=Yes, PackageDescription="DO-214-AB/SMC Molded Diode, Body 7.9x5.9mm, IPC Medium Density", Part Description="Surface Mount Schottky Barrier Rectifier", Part Number=B560C-13-F, Pin Count=2, PressFit=No, Sense=No, SMD=Yes, Socket=No
FL1: library part FIL_MURATA_BNX022-01L, "Block Type EMIFIL (LC Combined)", Manufacturer=MURATA, Manufacturer Part Number=BNX022-01L, Resistance=0.5R, Author="CERN DEM JLC", Component Type=Standard, ComponentHeight=3.3mm, CreateDate=10.10.2012, HelpURL=\\cern.ch\dfs\Applications\Altium\Datasheets\FIL_MURATA_BNX022-01L.pdf, LatestRevisionDate=10.10.2012, Mounted=Yes, Part Description="Block Type EMIFIL (LC Combined) SMD Type, BNX02* Series", Part Number=FIL_MURATA_BNX022-01L, Pin Count=2, Sense=No, SMD=Yes, Socket=No, Status=None
FTG1 FTG3: library part FIDUCIAL_TARGET_C100-200, "Fiducial Target", Author="CERN DEM JLC", Component Type="Standard (No BOM)", ComponentHeight=0mm, CreateDate=09.02.2010, Family=Fiducial, HelpURL=Undefined, LatestRevisionDate=04.04.2012, Mounted=No, PackageDescription="Round Fiducial Target, Top Layer, 1.0mm, Top Solder 2.0mm, Keepout =2.0mm", Part Description="Round Fiducial Target, Top Layer, 1.0mm, Top Solder 2.0mm, Keepout =2.0mm", Part Number=FIDUCIAL_TARGET_C100-200, Pin Count=1, Sense=No, SMD=Yes, Socket=No, Status=None
FTG2 FTG4: library part FIDUCIAL_TARGET_S100-200, "Fiducial Target", Author="CERN DEM JLC", Component Type="Standard (No BOM)", ComponentHeight=0mm, CreateDate=09.02.2010, Family=Fiducial, HelpURL=Undefined, LatestRevisionDate=04.04.2012, Mounted=No, PackageDescription="Square Fiducial Target, Top Layer, 1.0mm, Top Solder 2.0mm, Keepout =2.0mm", Part Description="Square Fiducial Target, Top Layer, 1.0mm, Top Solder 2.0mm, Keepout =2.0mm", Part Number=FIDUCIAL_TARGET_S100-200, Pin Count=1, Sense=No, SMD=Yes, Socket=No, Status=None
IC1: "60V, 5A Silent Switcher uModule Regulator", Case=BGA144, Manufacturer="ANALOG DEVICES", Author="CERN DEM HF", Bonding=No, Component Type=Standard, ComponentHeight=7.42mm, CreateDate=05.09.2022, Device=LTM4656EY, HelpURL=\\cern.ch\dfs\Applications\Altium\Datasheets\LTM4656.pdf, LatestRevisionDate=05.09.2022, Manufacturer Part Number=LTM4656EY, Mounted=Yes, PackageDescription="BGA, 1.27mm Pitch, Rect.; 144 Pin, 12 Columns X 12 Rows, 16.0mm X 16.0mm X 7.42mm H body, IPC Medium Density", Part Description="4.5V-28V to 6V-36V 180W Synchronous Boost µModule Regulator with Input-Output Short Protection", Part Number=LTM4656EY, Pin Count=144, PressFit=No, Sense=No, SMD=Yes, Socket=No
J1: library part MOLEX_39-30-0040, "Connector 4 Male", Manufacturer=MOLEX, Manufacturer Part Number=39-30-0040, Author="CERN DEM JLC", Component Type=Standard, ComponentHeight=11.4mm, CreateDate=2018-10-02, Family="Mini-Fit Jr.™", HelpURL=\\cern.ch\dfs\Applications\Altium\Datasheets\MOLEX_39-30-0040.pdf, LatestRevisionDate=2018-10-02, Mounted=Yes, Part Description="4.20mm (.165\") Pitch Mini-Fit Jr. Header, Dual Row, Right Angle with Snap-in Plastic Peg PCB Lock, 4 Circuits", Part Number=MOLEX_39-30-0040, Pin Count=4, PressFit=No, Sense=No, SMD=No, Socket=No, Status=None
J2: library part SWITCHCRAFT_712RA, "2.5 mm Center Pin, 5A, 48V, Right Angle, Through Hole, , DC Power Jack Connector", Manufacturer=SWITCHCRAFT, Manufacturer Part Number=712RA, Author="CERN DEM JLC", Component Type=Standard, ComponentHeight=13.8mm, CreateDate=2017-12-19, Family=Jack, HelpURL=\\cern.ch\dfs\Applications\Altium\Datasheets\SWITCHCRAFT_712RA.pdf, LatestRevisionDate=2017-12-19, Mounted=Yes, Part Description="2.5 mm Center Pin, 5A, 48VDC, Right Angle, Through Hole, Locking Power Jack Connector (Threaded Bushings)", Part Number=SWITCHCRAFT_712RA, Pin Count=3, PressFit=No, Sense=No, SMD=No, Socket=No, Status=None
J3: library part SAMTEC_HTSW-101-23-L-D, "Connector 2 Male", Manufacturer=SAMTEC, Manufacturer Part Number=HTSW-101-23-L-D, Author="CERN DEM JLC", Component Type=Standard, ComponentHeight=8.38mm, CreateDate=22.02.2018, Family="Header 2", HelpURL=\\cern.ch\dfs\Applications\Altium\Datasheets\SAMTEC_HTSW-101-23-L-D.pdf, LatestRevisionDate=22.02.2018, Mounted=Yes, Part Description="2 Contacts, Pitch 2.54mm, Dual Row Through Mount Straight Header (Post Lead 5.84mm, Tail Lead 2.92mm, Insulator 2.54mm)", Part Number=SAMTEC_HTSW-101-23-L-D, Pin Count=2, PressFit=No, Sense=No, SMD=No, Socket=No, Status=Preferred, Status Comment="High Temperature"
L1 L2: library part IND2525_10UH_20%_VISHAY_IHLP-2525CZ, "Inductor With Core", Case=2525, Manufacturer="VISHAY DALE", Manufacturer Part Number=IHLP2525CZER100M01, Power=3A, Resistance=0.102R, Tolerance=±20%, Author="CERN DEM JLC", Component Type=Standard, ComponentHeight=3mm, CreateDate=19.01.2015, HelpURL=\\cern.ch\dfs\Applications\Altium\Datasheets\IND2525_VISHAY_IHLP-2525CZ.pdf, LatestRevisionDate=19.01.2015, Mounted=Yes, Part Description="Low Profile, High Current IHLP® Inductor", Part Number=IND2525_10UH_20%_VISHAY_IHLP-2525CZ, Pin Count=2, Sense=No, SMD=Yes, Socket=No
LD1: library part LED_DIALIGHT_571-0112F, "2x LED  Botom Green, Top Red", Manufacturer=DIALIGHT, Manufacturer Part Number=571-0112F, Author="CERN DEM JLC", Bonding=No, Color=Red/Green, Component Type=Standard, ComponentHeight=8.6mm, CreateDate=09.11.2009, HelpURL=\\cern.ch\dfs\Applications\Altium\Datasheets\LED_DIALIGHT_571-0112F.pdf, LatestRevisionDate=17.03.2010, Mounted=Yes, PackageDescription="2x 2mm LED (Top: Red, Bot: Green) PCB Edge Mounting (Without positioning pins) DIALIGHT 571 Serie", Part Description="Dual 2mm  LEDs, Red Top,Green Bot, CBI® Circuit Board Indicator (Without positioning pins)", Part Number=LED_DIALIGHT_571-0112F, Pin Count=4, PressFit=No, Sense=No, SMD=No, Socket=No
MECH1 MECH2: library part Generic_mechanical, "generic", Manufacturer=Pasternack, Author=GK, Component Type=Standard, ComponentHeight=generic, CreateDate=28.10.2019, LatestRevisionDate=28.10.2019, Manufacturer Part Number=PE9067, Mounted=Yes, PackageDescription=generic, Part Description="Isolated Ground SMA Female to SMA Female Bulkhead Mount Adapter, with Plastic Isolator", Part Number=PE9067, Pin Count=0, PressFit=No, Sense=No, SMD=No, Socket=No, Status=None
MECH3 MECH5: library part Generic_mechanical, "generic", Manufacturer="Mini Circuits", Author=GK, Component Type=Standard, ComponentHeight=generic, CreateDate=28.10.2019, LatestRevisionDate=28.10.2019, Mounted=Yes, PackageDescription=generic, Part Description="MC amplifier", Pin Count=0, PressFit=No, Sense=No, SMD=No, Socket=No, Status=None
  MECH3: Manufacturer Part Number=ZHL-1-2WX-S, Part Number=ZHL-1-2WX-S
  MECH5: Manufacturer Part Number=ZHL-2010s, Part Number=ZHL-2010s
MECH4: library part Generic_mechanical, "generic", Manufacturer=nVent, Author=GK, Component Type=Standard, ComponentHeight=generic, CreateDate=28.10.2019, LatestRevisionDate=28.10.2019, Manufacturer Part Number=20849107, Mounted=Yes, PackageDescription=generic, Part Description="8HP front panel", Part Number=20849107, Pin Count=0, PressFit=No, Sense=No, SMD=No, Socket=No, Status=None
NUT1 NUT2 NUT3 NUT4 NUT5: library part BOSSARD_BN628-1241443_v, "Nut", Manufacturer=BOSSARD, Manufacturer Part Number="BN628 Art.1241443", Author="CERN DEM JMW", Component Type=Mechanical, ComponentHeight=2.4mm, CreateDate=04.12.2015, HelpURL=\\cern.ch\dfs\Applications\Altium\Datasheets\BOSSARD_BN628-1241443.pdf, LatestRevisionDate=04.12.2015, Mounted=Yes, PackageDescription="M3 Hexagon Nut ~0,8d, ISO 4032, DIN 934, Stainless Steel A2", Part Description="M3 Hexagon Nut ~0,8d, ISO 4032, DIN 934, Stainless Steel A2", Part Number=BOSSARD_BN628-1241443_v, Pin Count=0, PressFit=No, Sense=No, SMD=No, Socket=No, Status=None
R1 R2 R9 R11: library part R0603_4K7_1%_0.1W_100PPM, "Resistor - 1%", Case=0603, Manufacturer=GENERIC, Manufacturer1 ComponentHeight=0.55mm, Manufacturer1 Example="NIC COMPONENT", Manufacturer1 Part Number=NRC06F4701TRF, Power=0.1W, Tolerance=±1%, Author="CERN DEM JLC", Component Type=Standard, CreateDate=03.12.2007, HelpURL=\\cern.ch\dfs\Applications\Altium\Datasheets\R0603_NIC_NRC.pdf, LatestRevisionDate=13.03.2008, Manufacturer Part Number=R0603_4K7_1%_0.1W_100PPM, Mounted=Yes, Part Description="General Purpose Thick Film Chip Resistor", Part Number=R0603_4K7_1%_0.1W_100PPM, Pin Count=2, PressFit=No, Sense=No, SMD=Yes, Socket=No, Status=Preferred, TC=±100ppm/°C
R3 R5 R17 R23: library part R0603_0R_JUMPER, "Resistor", Case=0603, Manufacturer=GENERIC, Manufacturer1 ComponentHeight=0.55mm, Manufacturer1 Example="NIC COMPONENT", Manufacturer1 Part Number=NRC06Z0, Author="CERN DEM JLC", Component Type=Standard, CreateDate=03.12.2007, HelpURL=\\cern.ch\dfs\Applications\Altium\Datasheets\R0603_NIC_NRC.pdf, LatestRevisionDate=13.03.2008, Manufacturer Part Number=R0603_0R_JUMPER, Mounted=Yes, Part Description="1A (0.05R Max DC Resistance) Zero Ohm Jumper", Part Number=R0603_0R_JUMPER, Pin Count=2, PressFit=No, Sense=No, SMD=Yes, Socket=No, Status=Preferred
R4: library part R0603_11K5_0.1%_0.063W_10PPM, "Resistor - 0.1%", Case=0603, Manufacturer=GENERIC, Manufacturer1 ComponentHeight=0.5mm, Manufacturer1 Example="TYCO HOLSWORTHY", Manufacturer1 Part Number=RN73C1J11K5BTDF, Power=0.063W, Tolerance=±0.1%, Author="CERN DEM JLC", Component Type=Standard, CreateDate=03.12.2007, HelpURL=\\cern.ch\dfs\Applications\Altium\Datasheets\R0603_Tyco_RN73.pdf, LatestRevisionDate=13.03.2008, Manufacturer Part Number=R0603_11K5_0.1%_0.063W_10PPM, Mounted=Yes, Part Description="Thin Film Chip Resistor", Part Number=R0603_11K5_0.1%_0.063W_10PPM, Pin Count=2, PressFit=No, Sense=No, SMD=Yes, Socket=No, Status="Not Recommended", TC=±10ppm
R6: library part R0603_NO-VALUE, "Resistor", Case=0603, Author="CERN DEM JLC", Component Type=Standard, CreateDate=03.12.2007, HelpURL=Undefined, LatestRevisionDate=13.03.2008, Manufacturer=Undefined, Manufacturer1 ComponentHeight=Undefined, Manufacturer1 Example=Undefined, Manufacturer1 Part Number=Undefined, Manufacturer Part Number=R0603_NO-VALUE, Mounted=No, Part Description="Reserved Footprint For a 0603 (1608) Chip Resistor", Part Number=R0603_NO-VALUE, Pin Count=2, PressFit=No, Sense=No, SMD=Yes, Socket=No, Status=None
R7 R8 R12 R13 R14: library part R0402_120K_1%_0.0625W_100PPM, "Resistor - 1%", Case=0402, Manufacturer=GENERIC, Manufacturer1 ComponentHeight=0.4mm, Manufacturer1 Example="YAGEO PHYCOMP", Manufacturer1 Part Number=232270671204L, Power=0.0625W, Tolerance=±1%, Author="CERN DEM JLC", Component Type=Standard, CreateDate=03.12.2007, HelpURL=\\cern.ch\dfs\Applications\Altium\Datasheets\R0402_Phycomp_RC0402.pdf, LatestRevisionDate=17.10.2012, Manufacturer Part Number=R0402_120K_1%_0.0625W_100PPM, Mounted=Yes, Part Description="General Purpose Thick Film Chip Resistor", Part Number=R0402_120K_1%_0.0625W_100PPM, Pin Count=2, PressFit=No, Sense=No, SMD=Yes, Socket=No, Status="Not Recommended", TC=±100ppm/°C
R10: library part R0603_20K_1%_0.1W_100PPM, "Resistor - 1%", Case=0603, Manufacturer=GENERIC, Manufacturer1 ComponentHeight=0.55mm, Manufacturer1 Example="NIC COMPONENT", Manufacturer1 Part Number=NRC06F2002TRF, Power=0.1W, Tolerance=±1%, Author="CERN DEM JLC", Component Type=Standard, CreateDate=03.12.2007, HelpURL=\\cern.ch\dfs\Applications\Altium\Datasheets\R0603_NIC_NRC.pdf, LatestRevisionDate=13.03.2008, Manufacturer Part Number=R0603_20K_1%_0.1W_100PPM, Mounted=Yes, Part Description="General Purpose Thick Film Chip Resistor", Part Number=R0603_20K_1%_0.1W_100PPM, Pin Count=2, PressFit=No, Sense=No, SMD=Yes, Socket=No, Status=Preferred, TC=±100ppm/°C
SCREW1 SCREW2 SCREW3 SCREW4 SCREW5: library part BOSSARD_BN5687-3061606_v, "Screw", Manufacturer=BOSSARD, Manufacturer Part Number="BN5687 Art.3061606", Author="CERN DEM JLC", Component Type=Mechanical, ComponentHeight=2.4mm, CreateDate=07.02.2013, HelpURL=\\cern.ch\dfs\Applications\Altium\Datasheets\BOSSARD_BN5687-3061606.pdf, LatestRevisionDate=07.02.2013, Mounted=Yes, PackageDescription="M3 L=8mm Hexalobular Socket Pan Head Screw, Fully Threaded - Stainless Steel A2", Part Description="M3 L=8mm Hexalobular Socket Pan Head Screw, Fully Threaded, Stainless Steel A2", Part Number=BOSSARD_BN5687-3061606_v, Pin Count=0, PressFit=No, Sense=No, SMD=No, Socket=No, Status=None
SW1: library part 67L090_h_a, "Thermostat SPST (Normaly Close Contact)", Case=TO-220, Manufacturer="AIRPAX SENSATA", Author="CERN DEM JLC", Bonding=No, Component Type=Standard, ComponentHeight=4.95mm, CreateDate=18.06.2013, Device=67L090, HelpURL=\\cern.ch\dfs\Applications\Altium\Datasheets\67L090.pdf, LatestRevisionDate=18.06.2013, Manufacturer Part Number=67L090, Mounted=Yes, PackageDescription="TO-220 2-Terminal - Horizontal Surface Mount Through The Circuit Board", Part Description="90°C ±5°C, 0.5A 48VDC, SPST Open on Rise (Normaly Close) Subminiature Bimetal Thermostat", Part Number=67L090_h_a, Pin Count=2, PressFit=No, Sense=No, SMD=No, Socket=No
SW2: library part SW_OMRON_A6SN-1101, "1 Ways SPST DIP Switch", Manufacturer=OMRON, Manufacturer Part Number=A6SN-1101, Author="CERN DEM JLC", Component Type=Standard, ComponentHeight=4.6mm, CreateDate=25.02.2013, Family=Switch, HelpURL=\\cern.ch\dfs\Applications\Altium\Datasheets\SW_OMRON_A6SN-1101.pdf, LatestRevisionDate=25.02.2013, Mounted=Yes, PackageDescription="Body 4.48x7.5mm, 1 Way SPST Surface-Mounting Slide Switch With Flat Actuator (A6SN Series)", Part Description="1 Way SPST Surface-Mounting Slide Switch with Flat Actuator, Contact Rating 25mA 24VDC", Part Number=SW_OMRON_A6SN-1101, Pin Count=2, PressFit=No, Sense=No, SMD=Yes, Socket=No, Status=None
T1 T2: "N-CHANNEL MOSFET WITH DIODE", Case=SOT23-3, Manufacturer="ON SEMICONDUCTOR", Manufacturer Part Number=BSS138L, Author="CERN DEM JLC", Bonding=No, Component Type=Standard, ComponentHeight=1.11mm, CreateDate=23.03.2009, Device=BSS138LT1G, HelpURL=\\cern.ch\dfs\Applications\Altium\Datasheets\BSS138LT1G.pdf, LatestRevisionDate=25.05.2022, Mounted=Yes, PackageDescription="SOT23, 0.95mm Pitch; 3 Pin, 1.40mm W X 3.00mm L X 1.10mm H body, IPC Medium Density", Part Description="50V, 200mA N-Channel Enhancement Mode Field-Effect Transistor", Part Number=BSS138LT1G, Pin Count=3, PressFit=No, Sense=No, SMD=Yes, Socket=No

## Free pads (board coordinates)
  round 3.2 hole 3.2: 3(212,148) 4(212,140) 5(86,104) 6(96,104)

## Via types
v1: diameter 0.5, hole 0.2, Top Layer to Bottom Layer, tented both sides, 89 vias
v2: diameter 1.27, hole 0.711, Top Layer to Bottom Layer, tented both sides, 8 vias

## Nets (pads, with @x,y where several pads share a name; then routed paths per layer and width w, separated by ;. In a path a pad name is that pad's centre, name@x,y a point inside that pad or via, vN(x,y) a via of type N, cw(c..) or ccw(c..) an arc to the next point about the centre after c; other vN are vias at no path point)
BVIN: C12.1 C13.1 C14.2 C16.2 C17.2 D2.1 IC1.A1 IC1.A2 IC1.A3 IC1.A4 IC1.B1 IC1.B2 IC1.B3 IC1.B4 IC1.C1 IC1.C2 IC1.C3 IC1.C4 IC1.D1 IC1.D2 IC1.D3 IC1.F9 | length 10.4
  Top Layer w0.2: v1(171.552,155.626) 171.494,155.683 171.494,155.837 171.397,155.935 171.397,156.113 IC1.F9 171.987,156.857 171.987,158.98 172.002,158.995 172.002,159.615 171.987,159.63 171.987,160.25 171.993,160.256 171.993,160.744 v1(172.05,160.801)
  Bottom Layer w0.2: v1(171.552,155.626) 171.609,155.568 171.876,155.568 172.288,155.156 C17.2@172.288,155.118 ; v1(172.05,160.801) 172.05,162.079 172.274,162.303 174.457,162.303 v1(174.503,162.257)
GND: B3.1 B4.1 B5.1 B6.1 B8.1 B9.1 B18.1 B19.1 B21.1 C1.1 C2.2 C4.1 C5.2 C6.2 C7.1 C8.1 C9.1 C10.1 C11.2 C12.2 C13.2 C14.1 C15.2 C16.1 C17.1 C18.1 C19.2 C20.1 C21.1 C22.1 C23.1 C24.2 C25.1 C26.1 C27.2 C28.2 D1.2 D2.2 FL1.4 IC1.A5 IC1.A6 IC1.B5 IC1.B6 IC1.C5 IC1.C6 IC1.D4 IC1.D5 IC1.D6 IC1.D7 IC1.D8 IC1.D9 IC1.E1 IC1.E2 IC1.E4 IC1.E5 IC1.E6 IC1.E7 IC1.E9 IC1.E10 IC1.E11 IC1.E12 IC1.F2 IC1.F3 IC1.F4 IC1.F5 IC1.F10 IC1.F11 IC1.F12 IC1.G1 IC1.G2 IC1.G3 IC1.G5 IC1.G7 IC1.G8 IC1.G10 IC1.G11 IC1.G12 IC1.H1 IC1.H8 IC1.H9 IC1.H10 IC1.H11 IC1.H12 IC1.J7 IC1.J8 IC1.J9 IC1.J10 IC1.J11 IC1.K7 IC1.K8 IC1.K9 IC1.K10 IC1.K11 IC1.L7 IC1.L8 IC1.L9 IC1.L10 IC1.L11 IC1.L12 IC1.M7 IC1.M8 IC1.M9 IC1.M10 IC1.M11 IC1.M12 J3.1 pad.3 pad.4 pad.5 pad.6 R1.1 R4.2 R7.1 R8.1 R10.1 R11.1 R14.1 R17.1 R23.1 SW2.1 T1.2 T2.2 | length 78.9
  Top Layer w0.2: T1.2 92.062,167.462 v1(93.015,167.462) ; T2.2 97.75,171.95 98.225,171.475 R14.1@98.255,171.475 ; R14.1 R14.1@98.255,171.475 ; v1(99.162,171.526) 99.133,171.498 98.278,171.498 R14.1@98.255,171.475 ; SW2.1 131.575,169.8 132.779,169.8 132.989,169.59 v1(133.071,169.59)
  Top Layer w0.305: R1.1 82.365,158.115 v1(82.5,158.25) ; R23.1 87.205,169.5 v1(88,169.5) ; R17.1 87.395,83.75 v1(88.25,83.75) ; C11.2 87.69,81.75 v1(88.5,81.75) ; C15.2 87.68,171.5 v1(88.5,171.5) ; v1(99.974,158.445) 101.695,158.445 C2.2@101.75,158.5 ; v1(102.25,157.25) 102.25,158 102.255,158.005 v1(102.255,159.71) ; C2.2@103.25,158.5 103.255,158.495 v1(104.96,158.495) ; v1(107,156.5) 108.064,156.5 C27.2@108.067,156.497 ; v1(108.75,154.75) 108.75,155.824 108.572,156.002 108.75,156.181 v1(108.75,158) ; C27.2@109.567,156.497 109.569,156.5 v1(110.5,156.5) ; v1(113.29,159.605) 114.995,159.605 115,159.6 v1(115.75,159.6) ; v1(114.5,158.5) 114.5,158.585 114.495,158.59 114.495,159.095 C25.1 ; v1(127.5,157) 128.564,157 C24.2@128.567,156.997 ; v1(129.25,155.25) 129.25,156.324 129.072,156.502 129.25,156.681 v1(129.25,158.5) ; C24.2@130.067,156.997 130.069,157 v1(131,157) ; v1(134,165) 134.75,165 134.755,164.995 v1(136.46,164.995) ; v1(134.096,158.998) 135.801,158.998 135.806,158.993 v1(136.556,158.993) ; C23.1@135.25,165.5 135.255,165.505 135.255,166.01 135.25,166.015 v1(135.25,166.1) ; v1(135.306,157.893) 135.306,157.978 135.301,157.983 135.301,158.488 C22.1 ; v1(196.029,166.833) 197.734,166.833 D1.2@197.739,166.828 ; v1(196.54,158.005) C1.1@197.255,158.005 ; C1.1@197.25,158 197.255,157.995 C1.1@197.75,157.995 ; v1(197.74,165.08) 197.74,166.785 D1.2 D1.2@197.75,166.795 ; v1(197.75,157) C1.1@197.75,157.85 ; C1.1@197.75,158.005 C1.1@197.255,158.005 ; v1(197.75,168.5) D1.2@197.75,166.795 ; C1.1@198.245,157.995 C1.1@197.75,157.995 ; C1.1@198.25,158 198.245,158.005 C1.1@197.255,158.005 ; v1(198.96,157.995) C1.1@197.75,157.995 ; v1(199.46,166.79) 197.755,166.79 D1.2@197.75,166.795 ; v1(201.04,166.255) 202.745,166.255 FL1.4@202.75,166.25 ; v1(203.245,164.79) 203.245,166.495 FL1.4@203.25,166.5 ; FL1.4@203.325,166.43 203.33,166.435 v1(203.33,168.14) ; FL1.4@204,166.5 204.005,166.495 v1(205.71,166.495) ; v1(204.79,169.255) 206.495,169.255 FL1.4@206.5,169.25 ; v1(204.852,159.005) FL1.4@206.495,159.005 ; v1(206.92,157.42) 206.92,159.125 FL1.4@206.925,159.13 ; FL1.4@206.977,159.087 206.982,159.092 v1(206.982,160.797) ; FL1.4@207.25,159 207.255,158.995 v1(208.96,158.995) ; v1(209.245,167.79) 209.245,169.495 FL1.4@209.25,169.5 ; FL1.4@209.25,169.25 209.255,169.255 v1(209.255,170.96) ; FL1.4@211.75,169.5 211.755,169.495 v1(213.46,169.495)
  Bottom Layer w0.2: v1(166.879,158.538) 166.879,158.619 166.776,158.722 166.776,159.522 166.894,159.639 167.506,159.639 167.551,159.594 167.55,159.595 167.55,160.885 R8.1 ; R11.1 168.63,166.852 v1(168.63,167.538) ; R10.1 170.35,164.95 170.891,164.409 v1(170.891,164.338) ; v1(171.577,154.33) 171.577,153.521 171.694,153.403 C17.1 ; v1(171.679,150.673) 171.713,150.673 171.718,150.668 172.407,150.668 C10.1 ; C18.1 173.025,158.648 173.228,158.852 v1(173.228,159.258) ; C20.1 173.439,160.639 v1(173.477,160.639)
  other v1: 171.156,147.885 171.206,148.774 157.912,156.743 160.172,156.743 189.382,157.251 184.099,157.328 170.485,169.977 170.307,172.237
  other v2: 148.25,149.75 150,149.75 151.75,149.75 153.5,149.75 148.25,151.5 150,151.5 151.75,151.5 153.5,151.5
INTVCC: C19.1 IC1.G9 R5.1 | length 2.3
  Top Layer w0.2: IC1.G9@170.205,156.235 170.205,156.261 170.432,156.487 v1(170.513,156.487)
  Bottom Layer w0.2: C19.1 170.425,156.045 170.425,156.318 170.513,156.406 v1(170.513,156.487) ; R5.1 170.1,157.2 170.45,156.85 170.45,156.8 170.455,156.794 170.455,156.626 170.465,156.616 v1@170.51,156.616
MODE: IC1.G6 J3.2 R5.2 | length 14.7
  Top Layer w0.2: v1(161.671,159.283) 161.722,159.334 168.967,159.334 169.101,159.468 169.546,159.468 169.604,159.525 ; v1(169.886,159.432) 169.769,159.432 169.676,159.525 169.604,159.525 ; IC1.G6@170.028,159.995 170.028,159.963 169.604,159.54 169.604,159.525
  Bottom Layer w0.2: J3.2 159.824,155.143 161.671,156.99 v1(161.671,159.283) ; v1(169.886,159.432) 169.886,158.964 R5.2
NetB1_1: B1.1 C11.1 R17.2 | length 7.8
  Top Layer w0.305: B1.1 80.097,82.463 85.352,82.463 C11.1@85.725,82.09 ; C11.1 C11.1@85.725,82.09 ; R17.2 C11.1@85.725,82.09
NetB7_1: B7.1 C15.1 R23.2 | length 7.8
  Top Layer w0.305: B7.1 C15.1 85.56,171.18 R23.2
NetB10_1: B10.1 IC1.A7 | length 1.9
  Top Layer w0.2: v1(177.063,158.115) 177.063,158.119 177.72,158.775 IC1.A7@177.775,158.775
  Bottom Layer w0.2: v1(177.063,158.115) 177.063,158.119 177.67,158.726 B10.1
NetB11_1: B11.1 IC1.F8 R3.1 | length 62.8
  Top Layer w0.2: R3.1@123.114,172.872 133.54,172.872 134.937,171.475 142.418,171.475 143.815,170.078 167.615,170.078 167.97,169.723 167.97,167.265 168.113,167.122 168.113,165.916 167.925,165.728 v1(167.925,165.647)
  Top Layer w0.254: v1@170.942,158.08 v1(170.942,158.013) 170.942,157.947 171.09,157.799 171.09,157.784 171.32,157.554 IC1.F8
  Bottom Layer w0.2: v1(167.925,165.647) 167.868,165.589 167.868,165.236 167.808,165.176 167.774,165.176 166.71,164.112 166.71,162.658 167.697,161.671 168.732,161.671 169.097,161.306 169.097,160.932 169.345,160.684 169.345,159.824 169.226,159.706 169.226,159.32 169.083,159.177 169.083,158.996 169.231,158.848 169.231,158.241 169.458,158.013 v1(170.942,158.013)
NetB12_1: B12.1 IC1.H7 | length 1.8
  Top Layer w0.2: v1(167.945,158.039) 168.017,158.039 168.708,158.73 IC1.H7
  Bottom Layer w0.2: v1(167.945,158.039) 167.983,158.001 168.148,158.166 168.148,158.217 168.3,158.369 B12.1
NetB13_1: B13.1 IC1.H3 | length 1.5
  Top Layer w0.2: v1(168.3,163.449) 168.36,163.449 168.664,163.754 IC1.H3@168.732,163.754
  Bottom Layer w0.2: B13.1 167.729,163.779 168.002,163.506 168.243,163.506 v1(168.3,163.449)
NetB14_1: B14.1 IC1.G4 | length 0.6
  Top Layer w0.2: v1(169.672,162.966) 169.672,162.942 170.05,162.564 IC1.G4
NetB15_1: B15.1 IC1.H4 | length 0.6
  Top Layer w0.2: v1(168.3,162.331) 168.358,162.388 168.52,162.388 168.672,162.54 IC1.H4
NetB16_1: B16.1 IC1.H5 | length 1.7
  Top Layer w0.2: IC1.H5 168.835,161.27 169.439,161.874 v1(169.494,161.874)
  Bottom Layer w0.2: v1@169.52,161.823 169.52,161.768 169.901,161.387 B16.1
NetC3_1: C3.1 FL1.3 J1.1 J1.2 J2.2 J2.3 | length 32.6
  Top Layer w1: J1.2 225.745,147.005 J1.2@225.75,147
  Top Layer w2: FL1.3 225.365,166.43 229.75,162.045 229.75,153 228.171,151.421 225.841,151.421 J1.1 J1.2
NetC3_2: C3.2 FL1.1 J1.3 J1.4 J2.1 | length 28.2
  Top Layer w1: 220.12,161.88 222.875,159.125 ; J1.4 J1.3 ; 220.605,161.88 C3.2@220.605,163.985 ; J2.1 J2.1@224.292,157.968
  Top Layer w2: FL1.1 217.275,161.88 220.12,161.88 222.875,159.125 ; J1.3 220.245,156.495 223.005,159.255 J2.1@224.292,157.968
NetC18_2: C18.2 IC1.F7 | length 1.3
  Top Layer w0.254: v1(170.952,159.123) 170.952,159.11 171.32,158.742 IC1.F7
  Bottom Layer w0.254: v1(170.952,159.123) 171.019,159.123 171.187,158.954 171.278,158.954 C18.2@171.533,158.699
NetC20_2: C20.2 IC1.F6 R6.1 | length 2.5
  Top Layer w0.254: v1(170.685,160.69) 170.685,160.663 171.32,160.028 IC1.F6
  Bottom Layer w0.254: v1@170.732,160.643 170.732,160.568 171.001,160.299 C20.2@171.196,160.299 ; v1@170.764,160.807 170.764,160.964 171.25,161.45 R6.1
NetC21_2: C21.2 R6.2 | length 1.7
  Bottom Layer w0.254: R6.2 174.403,161.5 C21.2
NetC22_2: C22.2 C23.2 C24.1 L1.2 L2.1 | length 17.3
  Top Layer w2: L2.1 122.9,162.55 123.1,162.75 C24.1@129.25,162.75 ; C24.1 C24.1@129.25,162.75 ; C23.2@135.25,162.75 C24.1@129.25,162.75 ; C23.2@135.662,162.337 137.091,162.337 137.51,161.918 137.51,161.74 138.781,160.469 L1.2
NetIC1_E8: IC1.E8 R4.1 | length 1.8
  Top Layer w0.254: IC1.E8 172.59,157.427 173.103,156.914 v1(173.103,156.88)
  Bottom Layer w0.254: R4.1 172.5,157.45 173.152,156.798 v1@173.152,156.794
NetIC1_F1: IC1.F1 R9.2 R11.2 SW2.2 | length 45.8
  Top Layer w0.2: R9.2@129.159,171.653 133.078,171.653 134.481,170.25 SW2.2 142.653,170.25 143.484,169.418 v1(166.878,169.418) ; v1(170.836,166.973) 170.836,166.903 171.319,166.421 IC1.F1@171.348,166.421
  Bottom Layer w0.2: v1(166.878,169.418) 167.986,169.418 168.188,169.621 169.215,169.621 170.078,168.758 R11.2@170.078,166.903 ; R11.2 170.351,166.973 v1(170.836,166.973)
NetIC1_H2: IC1.H2 R10.2 | length 1.3
  Top Layer w0.2: IC1.H2 168.782,165.08 169.361,165.658 v1(169.363,165.658)
  Bottom Layer w0.2: R10.2@169.062,165.354 169.062,165.362 169.358,165.658 v1(169.363,165.658)
NetIC1_H6: IC1.H6 R7.2 R8.2 | length 2
  Top Layer w0.2: v1@168.377,160.249 168.409,160.217 168.455,160.217 168.672,160 IC1.H6
  Bottom Layer w0.2: R8.2 168.332,160.827 168.332,160.331 v1(168.275,160.274) 168.332,160.217 168.332,159.772 R7.2
NetLD1_1: LD1.1 R1.2 | length 4.1
  Top Layer w0.305: LD1.1 79.25,161.8 79.25,160 79.845,159.405 R1.2
NetLD1_3: LD1.3 R2.2 | length 5.9
  Top Layer w0.305: LD1.3 84.455,166.462 84.743,166.75 R2.2
NetR2_1: R2.1 T1.3 | length 2.4
  Top Layer w0.2: R2.1@87.401,166.599 87.5,166.5 T1.3
NetR12_1: R12.1 T1.1 T2.3 | length 9.1
  Top Layer w0.2: R12.1 91.625,164.185 91.625,165.325 91.832,165.532 T1.1@92.202,165.532 ; T1.1 92.906,165.55 94.175,166.819 94.175,170.775 94.367,170.967 T2.3@94.513,170.967
P12V0: C1.2 C9.2 C10.2 D1.1 FL1.2 IC1.A9 IC1.A10 IC1.A11 IC1.A12 IC1.B9 IC1.B10 IC1.B11 IC1.B12 IC1.C9 IC1.C10 IC1.C11 IC1.C12 IC1.D10 IC1.D11 IC1.D12 LD1.2 LD1.4 R12.2 SW1.1 | length 196